# EAGLE board cloud_humidity_sensor_panelize (EAGLE 6.4)
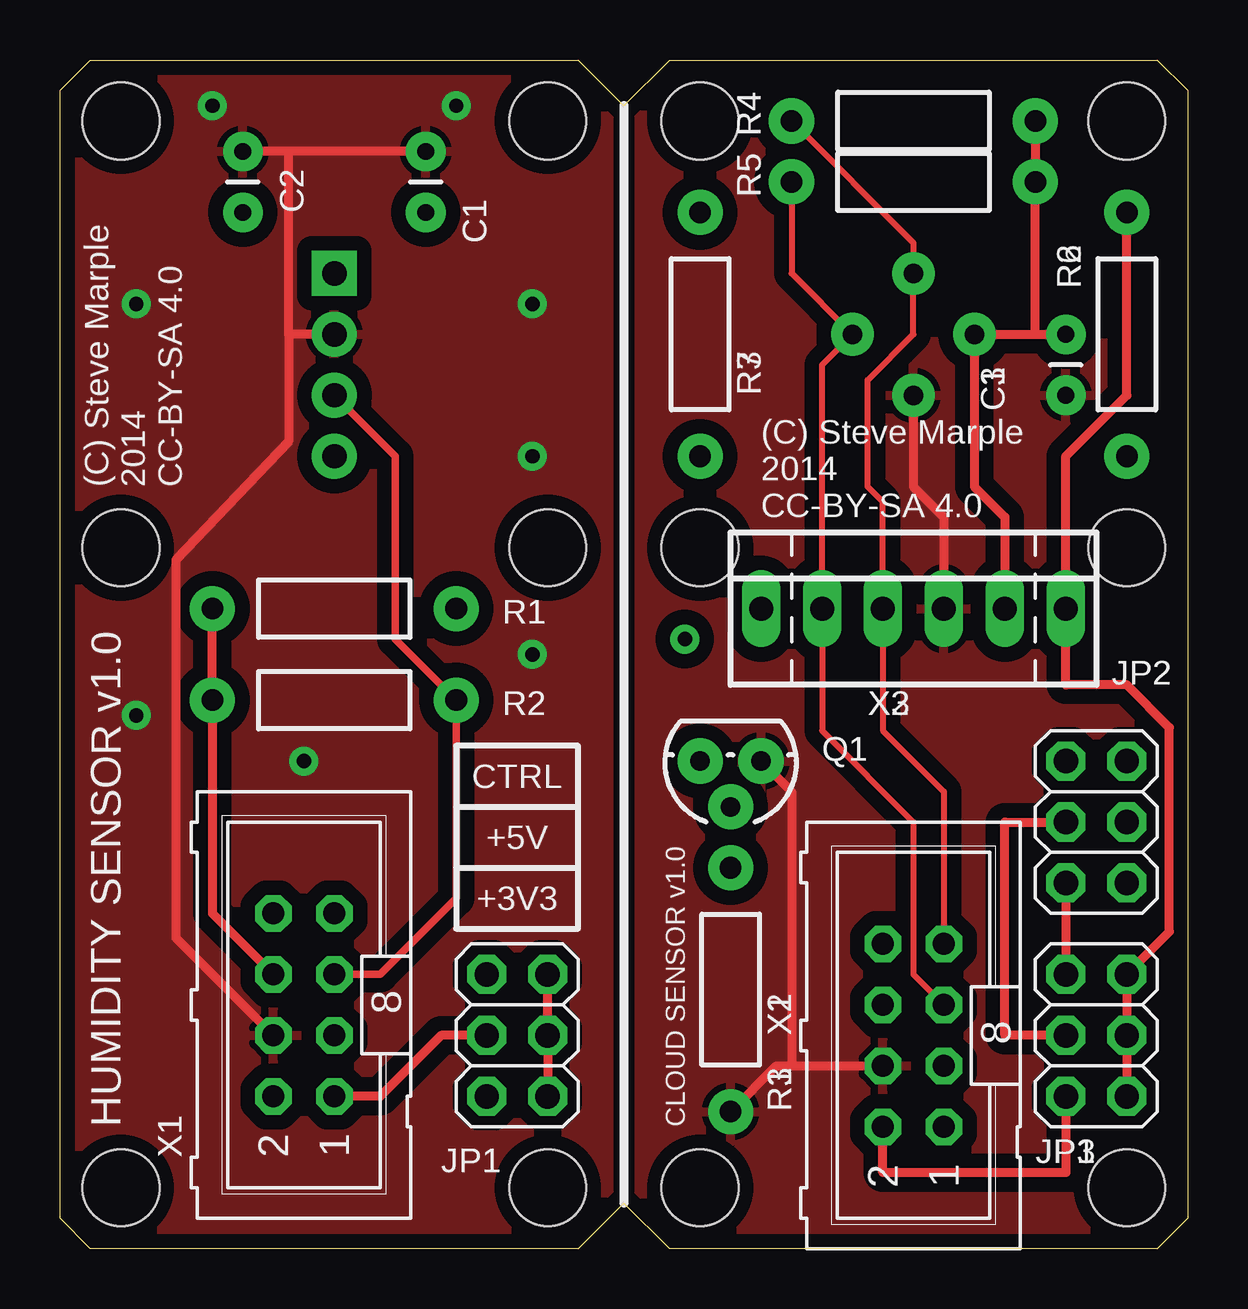
[diagram p0: board, top side]
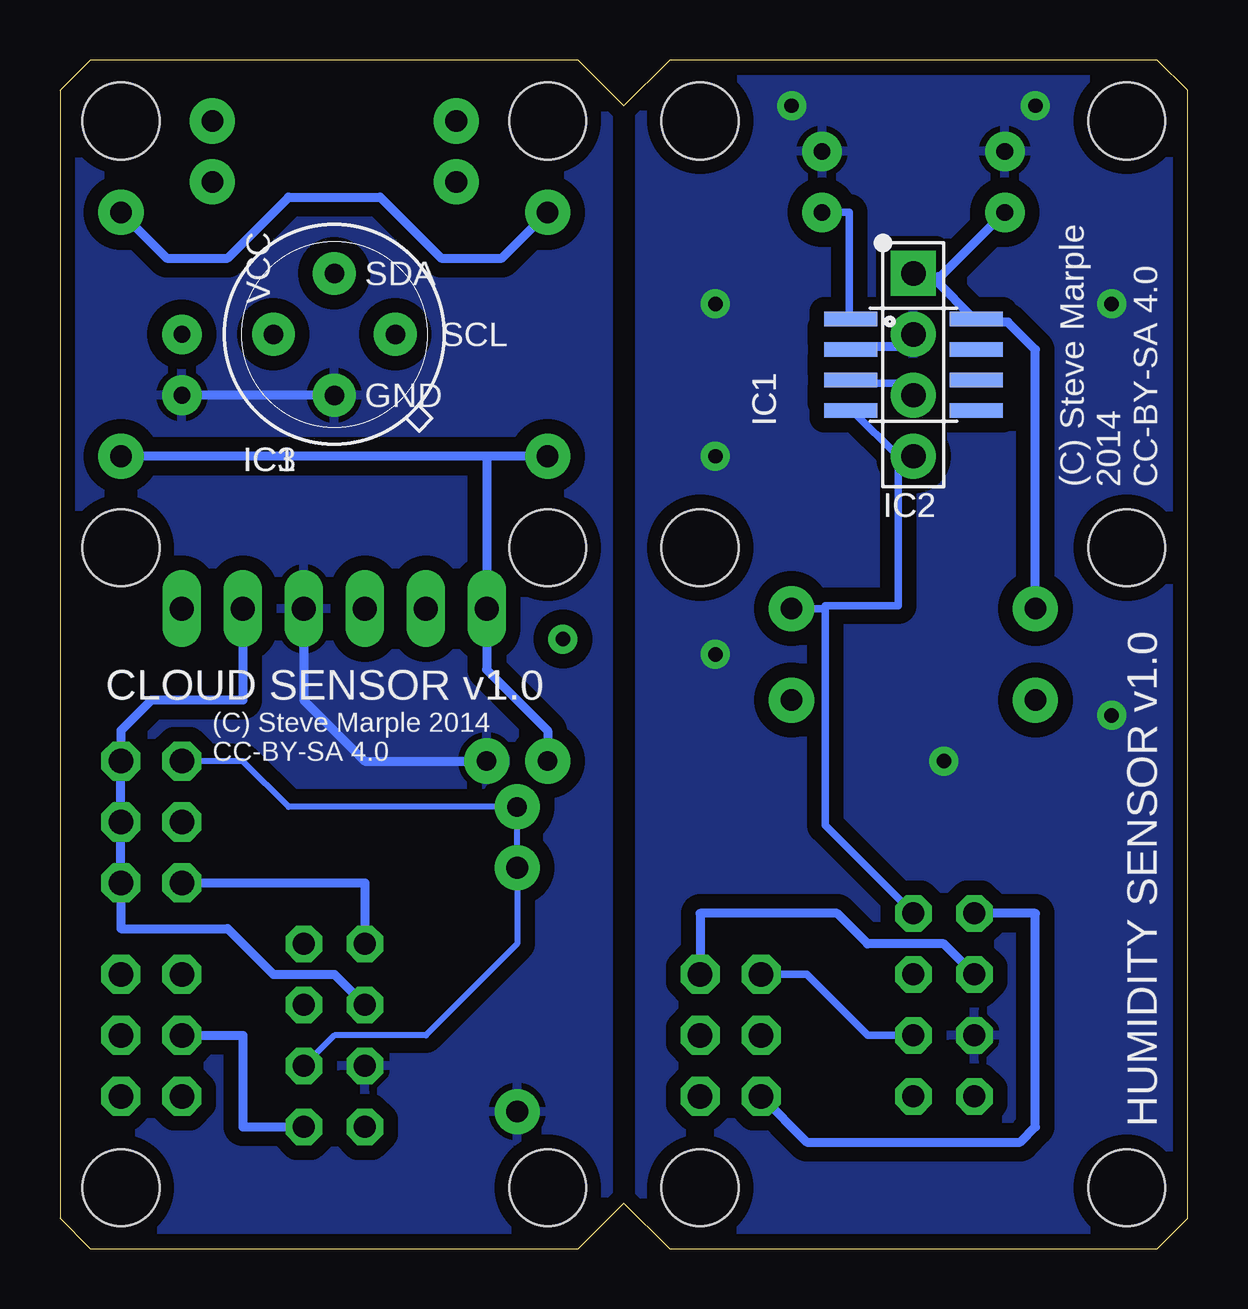
[diagram p1: board, bottom side, seen from below]

Size 46.99 x 49.53 mm. Coordinates in mm from the lower left corner, seen from the top.
Outline: 0,1.27 0,48.26 1.27,49.53 21.59,49.53 23.5,47.62 25.4,49.53 45.72,49.53 46.99,48.26 46.99,1.27 45.72,0 25.4,0 23.5,1.91 21.59,0 1.27,0 0,1.27
Copper layers (1*16): Top 0.035mm / dielectric 1.5mm / Bottom 0.035mm
Design rules "SparkFun_Iteadstudio_very_conservative": minimum track width 12mil, minimum drill 20mil, track to track 12mil, track to pad 12mil, pad to pad 12mil, via to via 12mil, smd to smd 12mil, copper to edge 0.5mm, drill to drill 8mil, minimum pad ring 12mil, minimum via ring 12mil, stop-mask expansion 4mil, vias tented up to drill 25mil, thermal gap 10mil
Net classes: 1 power: width 0.381 mm
Holes 3.2 mm at 2.54,2.54 20.32,2.54 20.32,46.99 2.54,46.99 2.54,29.21 20.32,29.21 26.67,2.54 44.45,2.54 44.45,46.99 26.67,46.99 26.67,29.21 44.45,29.21
bRestrict: area 13,37.8 to 15.2,38.4; area 13,36.5 to 15.2,37.1; area 7.6,37.8 to 9.9,38.4; area 7.6,36.5 to 9.9,37.1; area 7.6,35.3 to 9.9,35.9; area 13,35.3 to 15.2,35.9

## Footprints (pad centres in the part's own frame; a part is rotated, then mirrored left to right if it is on the bottom)
CAP-PTH-SMALL = drill 0.7 pad 1.651: 1 0,0; 2 2.54,0
SO08 = smd 0.61 x 2.21: 1 -1.905,-2.616; 2 -0.635,-2.616; 3 0.635,-2.616; 4 1.905,-2.616; 5 1.905,2.616; 6 0.635,2.616; 7 -0.635,2.616; 8 -1.905,2.616
SIL04 = drill 1.016 pad 1.88 square: 1 -3.81,0 | drill 1.016 pad 1.88: 2 -1.27,0; 3 1.27,0; 4 3.81,0
TO39-4 = drill 0.813 pad 1.778: 1 0,-2.54; 2 2.54,0; 3 0,2.54; 4 -2.54,0
2X03 = drill 1.016 octagon: 1 -2.54,-1.27; 2 -2.54,1.27; 3 0,-1.27; 4 0,1.27; 5 2.54,-1.27; 6 2.54,1.27
TO-92 = drill 0.813 pad 1.88: 1 -1.27,0; 2 0,1.905; 3 1.27,0
RES-AXIAL-0.4 = drill 0.9 pad 1.88: P$1 -5.08,0; P$2 5.08,0
ML8 = drill 0.914 octagon: 1 -3.81,-1.27; 2 -3.81,1.27; 3 -1.27,-1.27; 4 -1.27,1.27; 5 1.27,-1.27; 6 1.27,1.27; 7 3.81,-1.27; 8 3.81,1.27
22-23-2061 = drill 1 long: 1 -6.35,0; 2 -3.81,0; 3 -1.27,0; 4 1.27,0; 5 3.81,0; 6 6.35,0

## Placement (x,y rotation side)
C1  100n  [CAP-PTH-SMALL]  15.24,43.18 90 top
C2  220n  [CAP-PTH-SMALL]  7.62,43.18 90 top
C3  100n  [CAP-PTH-SMALL]  41.91,38.1 270 top
IC1  HIH613x  [SO08]  11.43,36.83 270 bottom
IC2  HIH612x  [SIL04]  11.43,36.83 270 bottom
IC3  MLX90614  [TO39-4]  35.56,38.1 90 bottom
JP1  VCC  [2X03]  19.05,8.89 90 top
JP2  VCC  [2X03]  43.18,17.78 90 top
JP3  HEAT VCC  [2X03]  43.18,8.89 270 top
Q1  2N7000  [TO-92]  27.94,20.32 180 top
R1  10k  [RES-AXIAL-0.4]  11.43,26.67 180 top
R2  10k  [RES-AXIAL-0.4]  11.43,22.86 180 top
R3  1M  [RES-AXIAL-0.4]  27.94,10.79 90 top
R4  10k  [RES-AXIAL-0.4]  35.56,46.99 0 top
R5  10k  [RES-AXIAL-0.4]  35.56,44.45 0 top
R6  100R  [RES-AXIAL-0.4]  44.45,38.1 90 top
R7  100R  [RES-AXIAL-0.4]  26.67,38.1 90 top
X1  FLC100 SHIELD  [ML8]  10.16,10.16 90 top
X2  SHIELD  [ML8]  35.56,8.89 90 top
X3  SENSOR  [22-23-2061]  35.56,26.67 0 top

## Library data of the parts
C1-C3 = SparkFun
IC1-IC3 Q1 R1-R7 X1 X2 = SteveMarple
JP1-JP3 = pinhead
X3 = con-molex; MF: MOLEX; MPN: 22-23-2061; OC_FARNELL: 1462922; OC_NEWARK: 27C1933

## Nets
+3V1 [power]: JP2.2 JP3.1 X2.8
+3V3 [power]: JP1.2 X1.8
+5V [power]: JP1.4 X1.1
+5V1 [power]: JP2.4 JP3.3 X2.1
CONTROL: JP1.6 X1.3
CONTROL1: JP2.6 Q1.2 R3.P$2 X2.3
GND [power]: C1.2 C2.2 IC1.2 IC2.2 X1.4
GND1 [power]: C3.2 IC3.4 Q1.1 R3.P$1 X2.4 X3.4
HEATER_CONTROL [power]: Q1.3 R6.P$1 R7.P$1 X3.1
HEATER_VCC [power]: JP3.2 JP3.4 JP3.6 R6.P$2 R7.P$2 X3.6
N$4: C1.1 IC1.1
SCL: IC1.3 IC2.3 R2.P$1 X1.5
SCL1: IC3.1 R5.P$1 X2.5 X3.2
SDA: IC1.4 IC2.4 R1.P$1 X1.7
SDA1: IC3.2 R4.P$1 X2.7 X3.3
VCC [power]: C2.1 IC1.8 IC2.1 JP1.1 JP1.3 JP1.5 R1.P$2 R2.P$2 X1.6
VCC1 [power]: C3.1 IC3.3 JP2.1 JP2.3 JP2.5 R4.P$2 R5.P$2 X2.6 X3.5
VIN [power]: X1.2
VIN1 [power]: JP3.5 X2.2

## Tracks (layer width: path | path; a pad name or v marks a point on that pad's centre or on a via)
+3V1
  Top 0.381: JP2.2 JP3.1
  Bottom 0.381: X2.8 34.29,15.24 JP2.2
+3V3
  Bottom 0.381: X1.8 6.35,13.97 6.35,5.08 6.99,4.45 15.88,4.45 JP1.2
+5V
  Top 0.381: X1.1 13.34,6.35 15.88,8.89 JP1.4
+5V1
  Top 0.381: JP2.4 39.37,17.78 39.37,8.89 JP3.3
  Bottom 0.381: X2.1 39.37,5.08 39.37,8.89 JP3.3
CONTROL
  Bottom 0.305: X1.3 13.34,8.89 15.88,11.43 JP1.6
CONTROL1
  Bottom 0.254: JP2.6 39.37,20.32 37.47,18.41 Q1.2 R3.P$2 27.94,12.7 31.75,8.89 35.56,8.89 X2.3
GND  (via drill 0.6)
  Top 0.381: C1.2 9.53,45.72 | 9.53,45.72 C2.2 | X1.4 4.83,12.95 4.83,28.7 9.53,33.66 9.53,38.1 | IC2.2 9.53,38.1 | 9.53,38.1 9.53,45.72
  Bottom 0.381: 14.1,37.47 IC1.2 13.97,37.59 11.94,37.59 IC2.2
  other vias: 6.35,47.62 16.51,47.62 10.16,20.32 3.17,39.37 19.68,39.37 3.17,22.23 19.68,24.77 26.04,25.4 19.68,33.02
  pour Bottom (isolate 0.61): -1.27,-1.27 -1.27,50.8 22.86,50.8 22.86,-1.27
  pour Top (isolate 0.61): -2.54,52.07 22.86,52.07 22.86,-2.54 -2.54,-2.54
GND1
  Top 0.381: R3.P$1 29.84,7.62 X2.4 30.48,7.62 30.48,19.05 Q1.1 | X3.4 36.83,30.48 35.56,31.75 IC3.4
  Bottom 0.381: IC3.4 C3.2 | X3.4 36.83,22.86 34.29,20.32 Q1.1
  pour Bottom (isolate 0.61): 24.13,-1.27 24.13,50.8 48.26,50.8 48.26,-1.27
  pour Top (isolate 0.61): 24.13,-2.54 24.13,52.07 49.53,52.07 49.53,-2.54
HEATER_CONTROL
  Bottom 0.381: Q1.3 26.67,21.59 29.21,24.13 X3.1 29.21,33.02 | R7.P$1 29.21,33.02 | 29.21,33.02 R6.P$1
HEATER_VCC
  Top 0.381: JP3.6 JP3.4 JP3.2 46.23,13.21 46.23,21.72 44.45,23.5 41.91,23.5 X3.6 41.91,33.02 44.45,35.56 R6.P$2
  Bottom 0.381: R7.P$2 28.57,41.27 31.11,41.27 33.66,43.81 37.47,43.81 40.01,41.27 42.55,41.27 R6.P$2
N$4
  Bottom 0.305: C1.1 14.1,43.18 14.1,38.73 IC1.1
SCL
  Top 0.305: X1.5 13.34,11.43 16.51,14.61 R2.P$1 13.97,25.4 13.97,33.02 IC2.3
  Bottom 0.305: IC2.3 11.94,36.07 13.84,36.07 13.97,36.2 IC1.3
SCL1
  Top 0.254: R5.P$1 30.48,40.64 IC3.1 31.75,36.83 X3.2 31.75,21.59 35.56,17.78 35.56,11.43 X2.5
SDA
  Bottom 0.305: IC1.4 13.97,34.92 12.06,33.02 IC2.4 12.06,32.89 12.06,26.8 15.11,26.8 15.11,26.67 | X1.7 15.11,17.65 15.11,26.67 | R1.P$1 15.11,26.67
SDA1
  Top 0.254: R4.P$1 35.56,41.91 IC3.2 35.56,38.1 33.66,36.2 33.66,31.75 34.29,31.11 X3.3 34.29,21.59 36.83,19.05 X2.7
VCC
  Top 0.381: JP1.1 JP1.3 JP1.5 | X1.6 6.35,13.97 R2.P$2 R1.P$2
  Bottom 0.381: 10.54,40.39 10.79,40.64 IC2.1 | 10.54,40.39 8.89,38.73 IC1.8 8.64,38.73 8.51,38.61 7.49,38.61 6.35,37.47 R1.P$2 | C2.1 10.29,40.51 10.41,40.51 10.54,40.39 | JP1.5 20.32,13.97 14.61,13.97 13.34,12.7 10.16,12.7 X1.6
VCC1
  Top 0.381: R4.P$2 R5.P$2 40.64,38.1 | X3.5 39.37,30.48 38.1,31.75 IC3.3 40.64,38.1 | 40.64,38.1 C3.1
  Bottom 0.381: X2.6 35.56,11.43 38.1,11.43 40.01,13.34 44.45,13.34 JP2.1 JP2.3 JP2.5 44.45,21.59 43.18,22.86 39.37,22.86 X3.5
VIN1
  Top 0.381: X2.2 34.29,3.17 41.91,3.17 JP3.5 41.91,6.41

## Text on the board
tSilk: CTRL | +5V | +3V3
_tsilk: (C) Steve Marple / 2014 / CC-BY-SA 4.0 | (C) Steve Marple / 2014 / CC-BY-SA 4.0 | HUMIDITY SENSOR v1.0 | CLOUD SENSOR v1.0
_bsilk: SDA | VCC | SCL | GND | (C) Steve Marple / 2014 / CC-BY-SA 4.0 | CLOUD SENSOR v1.0 | (C) Steve Marple 2014 / CC-BY-SA 4.0 | HUMIDITY SENSOR v1.0
_tNames: R4 | R5 | C2 | C1 | R2 | R3 | C1 | R1 | JP2 | R2 | X2 | Q1 | X1 | R1 | X1 | JP1 | JP1
_bNames: IC1 | IC1 | IC2